# Altium PCB CAN-Shield.PcbDoc
Units mil, origin at the board's own origin, x right, y up, seen from the top; angles counter-clockwise.
Board outline 2755.91 x 2165.35 mil, 2 copper layers (Top Layer, Bottom Layer); 21 components, 23 nets, 156 pads, 6 vias.
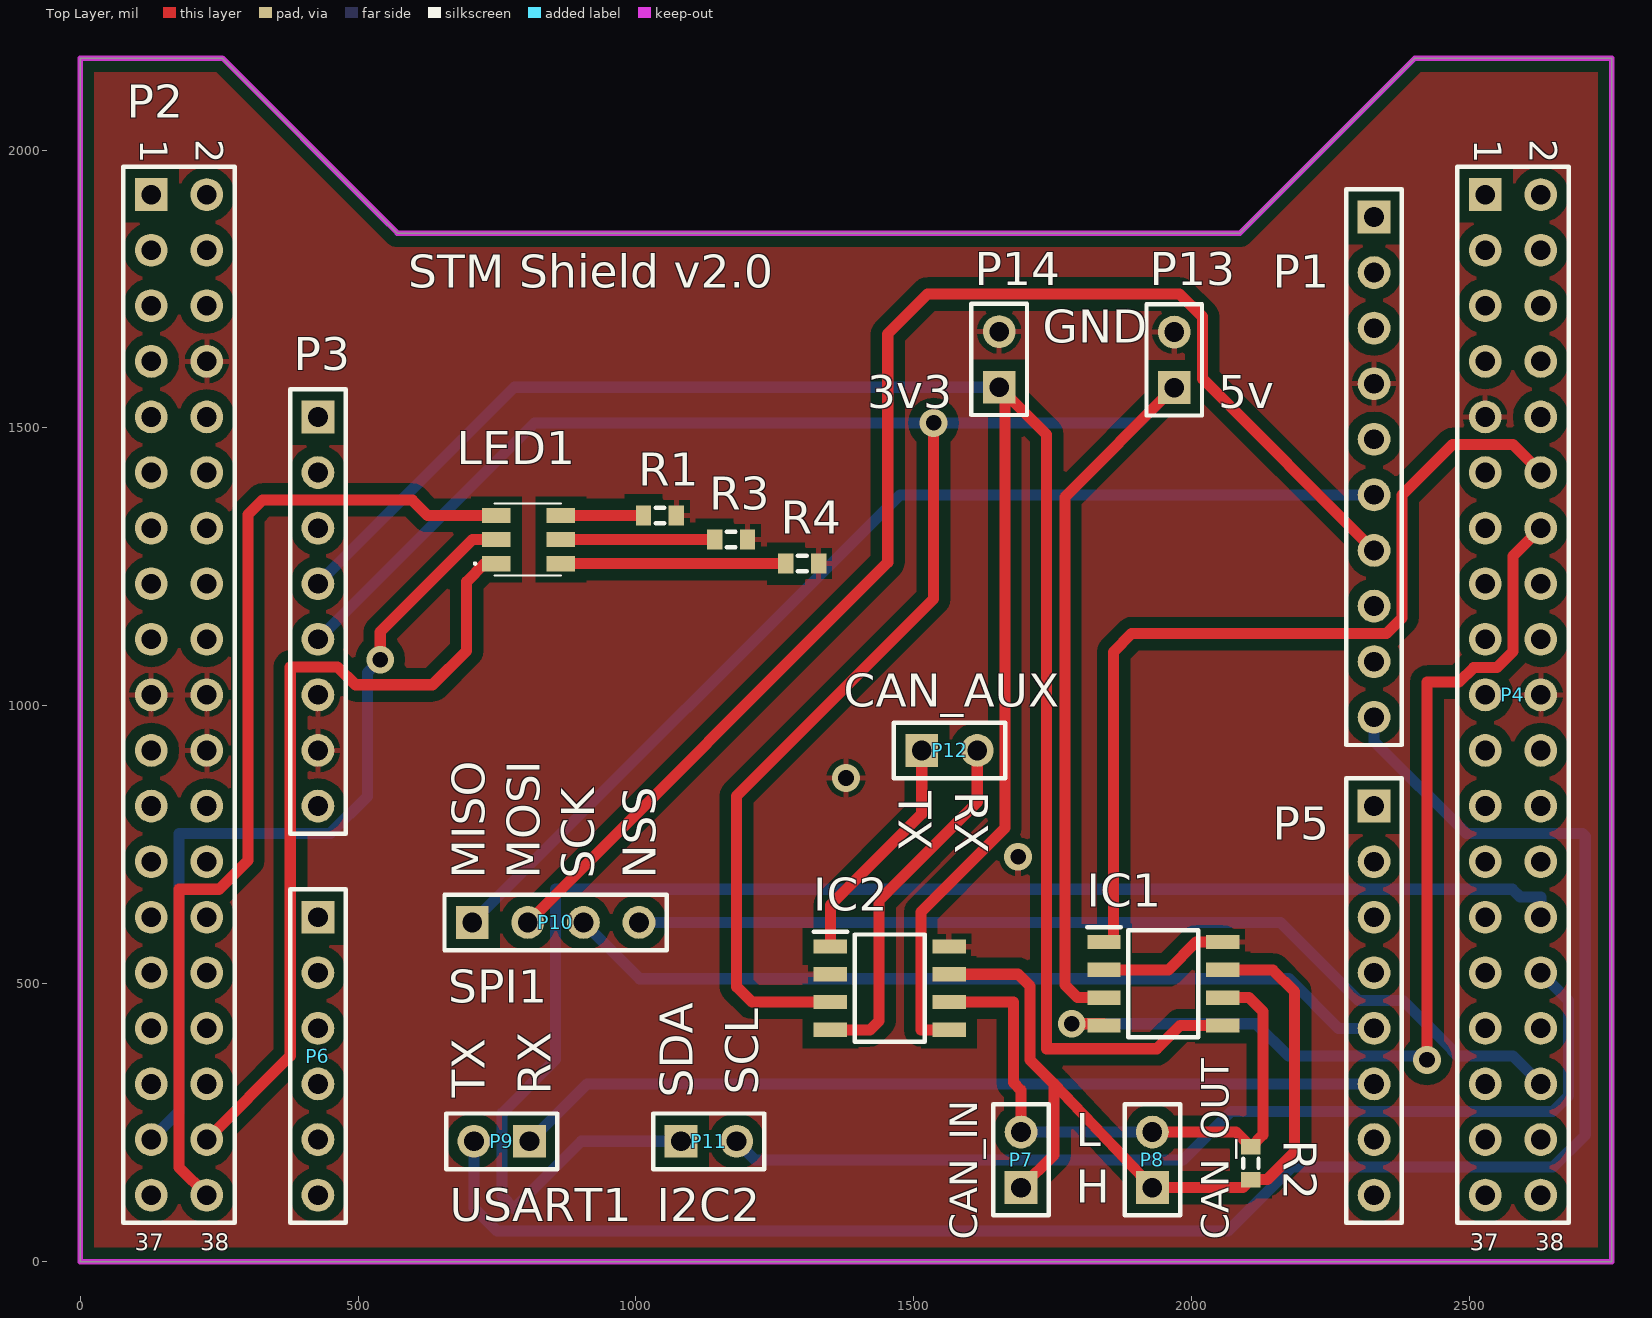
[diagram p0: Top Layer view]
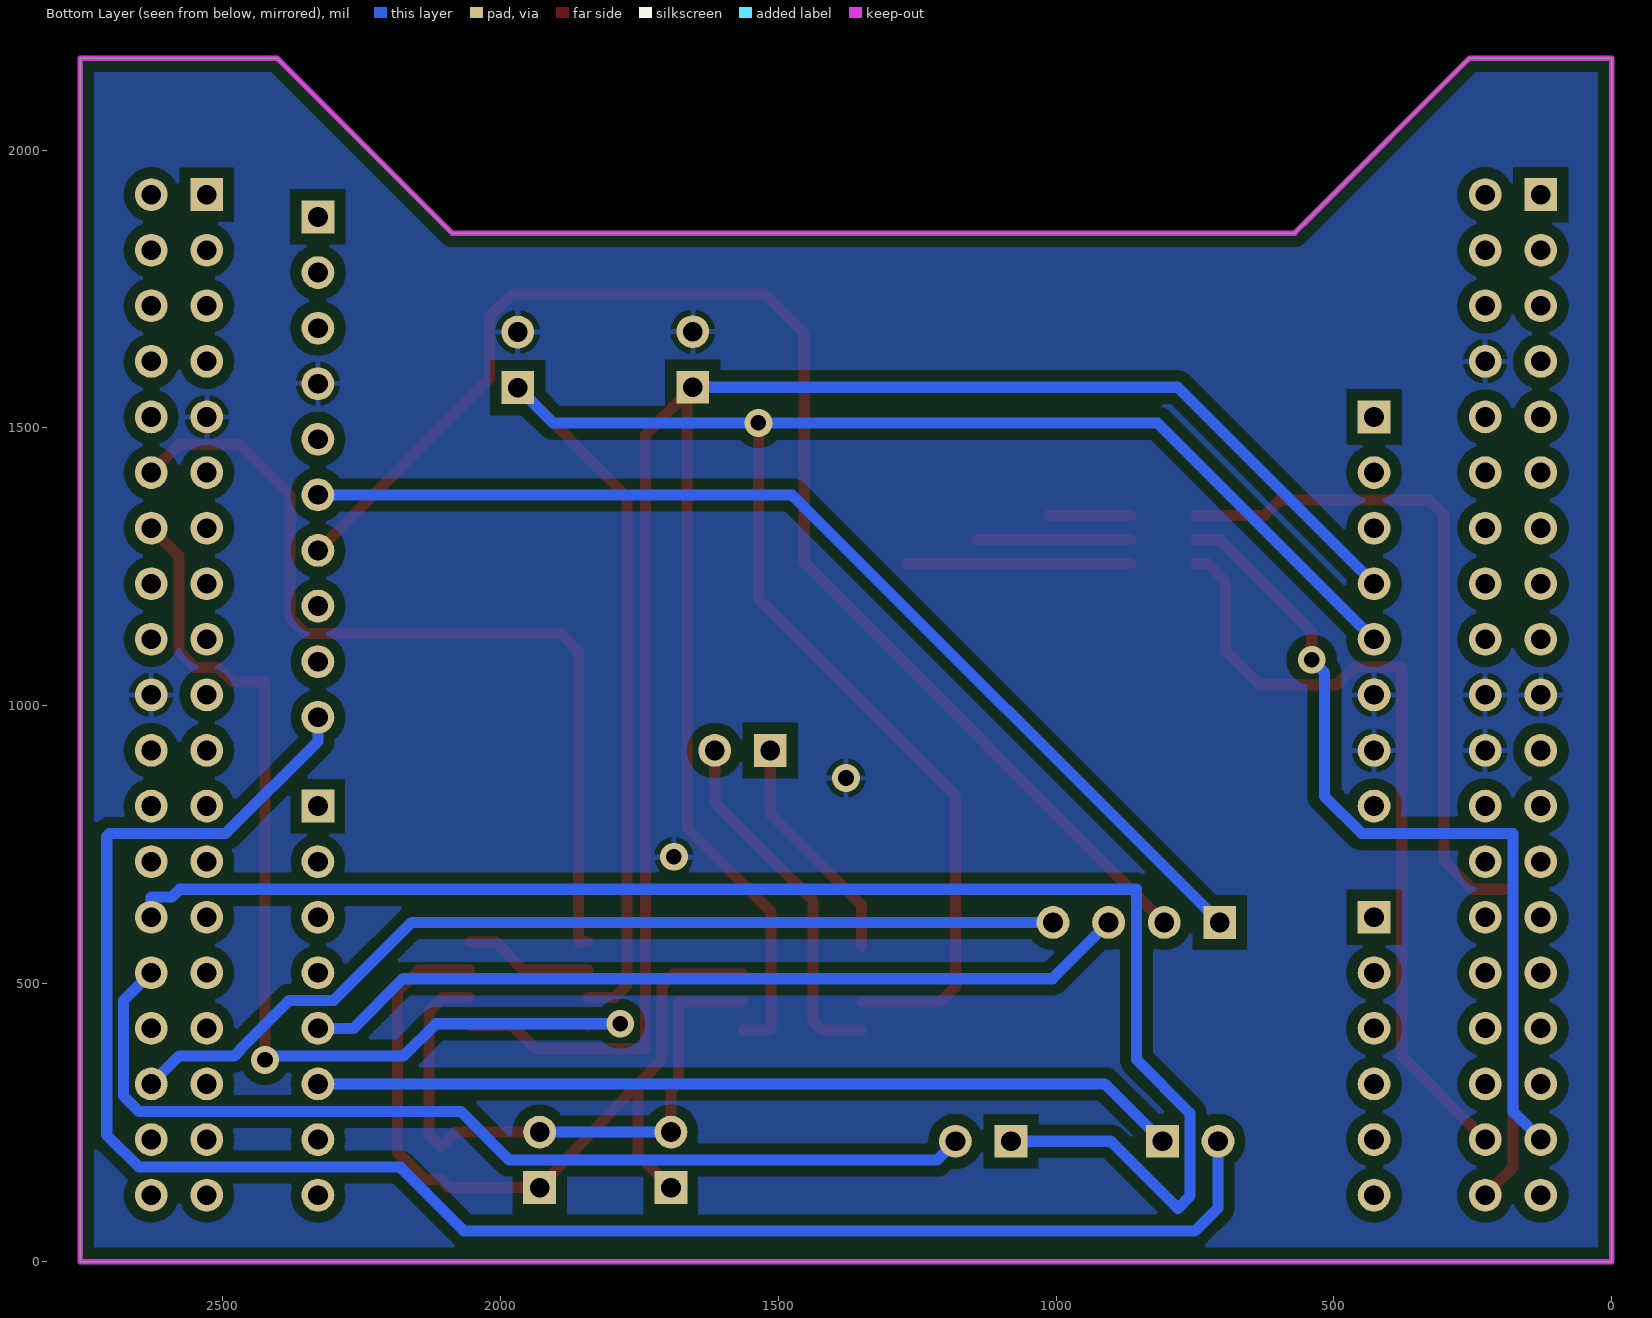
[diagram p1: Bottom Layer view, seen from below]

## Layer stack, top to bottom
Top Solder: solder mask 0.4, Solder Resist, Dk 3.5
Top Layer: signal copper 1.4
Dielectric 1: dielectric 12.6, FR-4, Dk 4.8
Bottom Layer: signal copper 1.4
Bottom Solder: solder mask 0.4, Solder Resist, Dk 3.5

## Board outline
0,0 0,2165.35 255.9,2165.35 541.34,1879.92 570.87,1850.39 2086.61,1850.39 2165.35,1929.13 2401.57,2165.35 2755.91,2165.35 2755.91,0

## Design rules (kind name [scope] priority, off if disabled: settings)
Clearance [All] p1: gap=10 ignorepadtopadclearanceinfootprint=FALSE except(0: Arc-Hole Track-Hole SMDPad-Hole THPad-Hole Via-Hole Fill-Hole Poly-Hole Region-Hole Text-Hole; 20: Arc-Fill Arc-Poly Arc-Region Track-Fill Track-Poly Track-Region SMDPad-Fill SMDPad-Poly SMDPad-Region THPad-Fill THPad-Poly THPad-Region Via-Fill Via-Poly Via-Region Fill-Fill Fill-Poly Fill-Region Poly-Poly Poly-Region Region-Region)
MinimumSolderMaskSliver [All] p1: minsoldermaskwidth=5
PolygonConnect [All] p1: connectstyle=Relief reliefconductorwidth=10 reliefentries=4 polygonreliefangle="90 Angle" airgapwidth=10
RoutingVias [All] p1: holewidth=28 width=50 viastyle="Through Hole" minholewidth=28 minwidth=50 maxholewidth=28 maxwidth=50
SilkToSilkClearance [All] p1: silktosilkclearance=2
SilkToSolderMaskClearance [IsPad] p1: minsilkscreentomaskgap=1 clearancetoexposedcopper=TRUE
SolderMaskExpansion [All] p1: expansion=4
Width [All] p1: maxlimit=20 minlimit=10 preferedwidth=20 minimp=50.000000 maximp=50.000000 favimp=50.000000
27 further rules are at their usual default settings.

## Components (designator, comment, footprint, x,y, rotation, side; value= is the part's Value field where it differs from the comment)
IC1 "TCAN1042HVDQ1" SOIC127P600X175-8N 1948.82,500 r0 top
IC2 "TCAN1042HVDQ1" SOIC127P600X175-8N 1456.69,492.13 r0 top
LED1 "KRTBLSLPS1.32-VUVX-EQ+BTBV-D8+TWTZ-L1-B" KRTBLSLPS132VUVXEQBTBVD8TWTZL1B 807.09,1299.21 r0 top
P1 "Header 10" HDR1X10 2327.95,1879.53 r270 top locked
P2 "Header 19X2" HDR2X19 127.95,1919.68 r270 top locked
P3 "Header 8" HDR1X8 427.95,1519.69 r270 top locked
P4 "Header 19X2" HDR2X19 2527.95,1919.68 r270 top locked
P5 "Header 8" HDR1X8 2327.95,819.68 r270 top locked
P6 "Header 6" HDR1X6 427.95,619.68 r270 top locked
P7 "CAN_IN" HDR1X2 1692.91,133.19 r90 top
P8 "CAN_OUT" HDR1X2 1929.13,133.19 r90 top
P9 "USART1" HDR1X2 808.66,216.54 r180 top
P10 "SPI1" HDR1X4 705.51,610.24 r0 top
P11 "I2C2" HDR1X2 1081.1,216.53 r0 top
P12 "CAN_AUX" HDR1X2 1514.17,919.69 r0 top
P13 "5v" HDR1X2 1968.5,1572.44 r90 top
P14 "3v3" HDR1X2 1653.54,1573.23 r90 top
R1 "Res3" J1-0603 1043.31,1342.52 r0 top value=200
R2 "Res3" J1-0603 2106.3,177.17 r270 top value=120
R3 "Res3" J1-0603 1171.26,1299.21 r0 top value=200
R4 "Res3" J1-0603 1299.21,1255.91 r0 top value=200

## Footprints (in the part's own frame and the unit in brackets; to place one, negate y for a bottom-side part, rotate by r counter-clockwise, add the part's x,y. Pads: shape width x height; smd on the part's side, far side on the other; paste and mask are expansions set on the pad)
HDR1X2 [mm] "Connector; Header; 2 Position"
  rect 1.5x1.5 hole 0.9: 1(0,0)
  round 1.5 hole 0.9: 2(2.54,0)
  silkscreen extent -1.27,-1.27 3.81,1.27
HDR1X4 [mm] "Connector; Header; 4 Position"
  rect 1.5x1.5 hole 0.9: 1(0,0)
  round 1.5 hole 0.9: 2(2.54,0) 3(5.08,0) 4(7.62,0)
  silkscreen extent -1.27,-1.27 8.89,1.27
HDR1X6 [mm] "Connector; Header; 6 Position"
  rect 1.5x1.5 hole 0.9: 1(0,0)
  round 1.5 hole 0.9: 2(2.54,0) 3(5.08,0) 4(7.62,0) 5(10.16,0) 6(12.7,0)
  silkscreen extent -1.27,-1.27 13.97,1.27
HDR1X8 [mm] "Connector; Header; 8 Position"
  rect 1.5x1.5 hole 0.9: 1(0,0)
  round 1.5 hole 0.9: 2(2.54,0) 3(5.08,0) 4(7.62,0) 5(10.16,0) 6(12.7,0) 7(15.24,0) 8(17.78,0)
  silkscreen extent -1.27,-1.27 19.05,1.27
HDR1X10 [mm] "Connector; Header; 10 Position"
  rect 1.5x1.5 hole 0.9: 1(0,0)
  round 1.5 hole 0.9: 2(2.54,0) 3(5.08,0) 4(7.62,0) 5(10.16,0) 6(12.7,0) 7(15.24,0) 8(17.78,0) 9(20.32,0) 10(22.86,0)
  silkscreen extent -1.27,-1.27 24.13,1.27
HDR2X19 [mm] "Connector; Header; 19x2 Position"
  rect 1.5x1.5 hole 0.9: 1(0,0)
  round 1.5 hole 0.9: 2(0,2.54) 3(2.54,0) 4(2.54,2.54) 5(5.08,0) 6(5.08,2.54) 7(7.62,0) 8(7.62,2.54) 9(10.16,0) 10(10.16,2.54) 11(12.7,0) 12(12.7,2.54) 13(15.24,0) 14(15.24,2.54) 15(17.78,0) 16(17.78,2.54) 17(20.32,0) 18(20.32,2.54) 19(22.86,0) 20(22.86,2.54) 21(25.4,0) 22(25.4,2.54) 23(27.94,0) 24(27.94,2.54) 25(30.48,0) 26(30.48,2.54) 27(33.02,0) 28(33.02,2.54) 29(35.56,0) 30(35.56,2.54) 31(38.1,0) 32(38.1,2.54) 33(40.64,0) 34(40.64,2.54) 35(43.18,0) 36(43.18,2.54) 37(45.72,0) 38(45.72,2.54)
  silkscreen extent -1.27,-1.27 46.99,3.81
J1-0603 [mm] "Chip Resistor, Body 1.6x0.8mm, IPC High Density"
  rect 0.7x0.9 smd: 1(-0.75,0) 2(0.75,0)
  silkscreen extent -0.2,-0.35 0.2,0.35, body extent -0.85,-0.48 0.85,0.48, height 0.9
KRTBLSLPS132VUVXEQBTBVD8TWTZL1B [mm]
  rect 1.3x0.7 smd: A1(-1.475,-1.1) A2(-1.475,0) A3(-1.475,1.1) C1(1.475,-1.1) C2(1.475,0) C3(1.475,1.1)
  silkscreen extent -2.5,-1.65 1.48,1.65, body extent -1.55,-1.65 1.55,1.65, height 2.14
SOIC127P600X175-8N [mm]
  rect 1.525x0.65 smd: 1(-2.712,1.905) 2(-2.712,0.635) 3(-2.712,-0.635) 4(-2.712,-1.905) 5(2.712,-1.905) 6(2.712,-0.635) 7(2.712,0.635) 8(2.712,1.905)
  silkscreen extent -3.47,-2.45 1.6,2.58, body extent -3,-2.45 3,2.45, height 1.75

## Part data
IC1 IC2: "Integrated Circuit", Manufacturer_Name="Texas Instruments", Mouser Part Number=595-TCAN1042HVDQ1, Arrow Part Number=TCAN1042HVDQ1, Arrow Price/Stock=https://www.arrow.com/en/products/tcan1042hvdq1/texas-instruments, Datasheet Link=http://www.ti.com/lit/gpn/tcan1042hv-q1, Height=1.75mm, Manufacturer_Part_Number=TCAN1042HVDQ1, Mouser Price/Stock=https://www.mouser.com/Search/Refine.aspx?Keyword=595-TCAN1042HVDQ1
LED1: "LED", Manufacturer_Name=OSRAM, Mouser Part Number=720-KRTBLSLPS13A0062, Arrow Part Number=KRTBLSLPS1.32-VUVX-EQ+BTBV-D8+TWTZ-L1-B, Datasheet Link=https://dammedia.osram.info/media/resource/hires/osram-dam-6176296/KRTB%20LSLPS1.32_EN.pdf, Height=2.04mm, Manufacturer_Part_Number=KRTBLSLPS1.32-VUVX-EQ+BTBV-D8+TWTZ-L1-B, Mouser Price/Stock=https://www.mouser.co.uk/ProductDetail/OSRAM-Opto-Semiconductors/KRTBLSLPS132-VUVX-EQ%2bBTBV-D8%2bTWTZ-L1-B?qs=OlC7AqGiEDms9aB20KQuCA%3D%3D
P1: "Header, 10-Pin", LatestRevisionDate=17-Jul-2002, LatestRevisionNote="Re-released for DXP Platform.", Publisher="Altium Limited"
P2 P4: "Header, 19-Pin, Dual row", LatestRevisionDate=17-Jul-2002, LatestRevisionNote="Re-released for DXP Platform.", Publisher="Altium Limited"
P3 P5: "Header, 8-Pin", LatestRevisionDate=17-Jul-2002, LatestRevisionNote="Re-released for DXP Platform.", Publisher="Altium Limited"
P6: "Header, 6-Pin", LatestRevisionDate=17-Jul-2002, LatestRevisionNote="Re-released for DXP Platform.", Publisher="Altium Limited"
P7 P8 P9 P11 P12 P13 P14: library part "Header 2", "Header, 2-Pin", LatestRevisionDate=17-Jul-2002, LatestRevisionNote="Re-released for DXP Platform.", Publisher="Altium Limited"
P10: library part "Header 4", "Header, 4-Pin", LatestRevisionDate=17-Jul-2002, LatestRevisionNote="Re-released for DXP Platform.", Publisher="Altium Limited"
R1 R2 R3 R4: "Resistor", LatestRevisionDate=29-May-2009, LatestRevisionNote="IPC-7351 Footprint Added.", PackageDescription="Chip Resistor", PackageReference=J1-0603, Published=8-Jun-2000, Publisher="Altium Limited"

## Via types
v1: diameter 50, hole 28, Top Layer to Bottom Layer, 6 vias

## Nets (pads, with @x,y where several pads share a name; then routed paths per layer and width w, separated by ;. In a path a pad name is that pad's centre, name@x,y a point inside that pad or via, vN(x,y) a via of type N, cw(c..) or ccw(c..) an arc to the next point about the centre after c; other vN are vias at no path point)
+5: IC1.3 IC2.3 P3.5 P13.1 | length 4305.3
  Top Layer w20: IC2.3 1208.66,467.13 1181.1,494.69 1181.1,838.1 1535.43,1192.43 v1(1535.43,1509) ; IC1.3 1794.63,475 1771.65,497.98 1771.65,1375.59 P13.1
  Bottom Layer w20: P3.5 817.27,1509 v1(1535.43,1509) 1905.06,1509 P13.1
AUX_CAN_RX: IC2.4 P12.2 | length 653.7
  Top Layer w20: IC2.4 1421.06,417.13 1437.01,433.07 1437.01,649.61 1614.17,826.77 P12.2
AUX_CAN_TX: IC2.1 P12.1 | length 420.6
  Top Layer w20: IC2.1 1349.92,641.26 1514.17,805.51 P12.1
CAN_H: IC1.7 IC2.7 P7.1 P8.1 R2.2 | length 1533.5
  Top Layer w20: IC2.7 1687.6,517.13 1709,495.72 1709,363.03 1751.97,320.07 ; P7.1 1751.97,192.25 1751.97,320.07 ; IC1.7 2145.67,525 2185.04,485.63 2185.04,196.85 2135.83,147.64 R2.2 2091.85,133.19 P8.1 1751.97,320.07
CAN_L: IC1.6 IC2.6 P7.2 P8.2 R2.1 | length 1114.3
  Top Layer w20: IC2.6 1678.54,467.13 1679,466.67 1679,322.21 1692.91,308.29 P7.2 ; P8.2 2079.8,233.19 R2.1 2127.95,228.35 2127.95,450 2102.95,475 IC1.6
  Bottom Layer w20: P7.2 P8.2
CAN_RX: IC1.4 P4.14 | length 1827
  Top Layer w20: v1(1784,428) 1842.05,428 IC1.4 ; v1(2423.26,362.95) 2423.26,1042.74 2480.96,1042.74 2507.44,1069.21 2549.21,1069.21 2578,1098 2578,1269.73 P4.14
  Bottom Layer w20: v1(1784,428) 2116,428 2174,370 2416.21,370 v1(2423.26,362.95)
CAN_TX: IC1.1 P4.12 | length 1612.7
  Top Layer w20: IC1.1 1859,575 1859,1097 1892,1130 2350,1130 2378,1158 2378,1379 2469,1470 2577.64,1470 P4.12
GND: IC1.2 IC1.8 IC2.2 IC2.8 P1.4 P2.8 P2.19 P2.20 P2.22 P3.6 P3.7 P4.9 P4.20 P13.2 P14.2 R1.2 R3.2 R4.2 | length 234.3
  Top Layer w20: IC1.2 1958,525 2008,575 IC1.8
  other v1: 1687.6,728.35 1377.95,870.16
I2C2_SCL: P4.30 P11.2 | length 1800.8
  Bottom Layer w20: P11.2 1214.64,183 1984,183 2071,270 2650,270 2678,298 2678,469.64 P4.30
I2C2_SDA: P4.28 P11.1 | length 2787.7
  Bottom Layer w20: P11.1 901.54,216.54 781,96 759,118 759,267 855.51,363.51 855.51,670 2577,670 2591,656 2627.95,656 P4.28
MISO: P1.6 P10.1 | length 1941.1
  Bottom Layer w20: P10.1 1474.8,1379.53 P1.6
MOSI: P1.7 P10.2 | length 2488.2
  Top Layer w20: P10.2 1453,1257.72 1453,1669 1525,1741 1978,1741 2019,1700 2019,1588.48 P1.7
NetLED1_C1: LED1.C1 R4.1 | length 404.5
  Top Layer w20: LED1.C1 R4.1
NetLED1_C2: LED1.C2 R3.1 | length 276.6
  Top Layer w20: LED1.C2 R3.1
NetLED1_C3: LED1.C3 R1.1 | length 148.6
  Top Layer w20: LED1.C3 R1.1
NSS: P4.34 P10.4 | length 1743.9
  Bottom Layer w20: P10.4 2159.76,610.24 2300,470 2379.85,470 2468.26,381.59 2468.26,379.74 2478,370 2577.64,370 P4.34
RGB_B: LED1.A1 P2.36 | length 1459.9
  Top Layer w20: P2.36 378,369.73 378,1070 463.37,1070 495.45,1037.93 634.29,1037.93 695.18,1098.81 695.18,1223.18 727.91,1255.91 LED1.A1
RGB_G: LED1.A2 P2.35 | length 1521.2
  Top Layer w20: v1(540,1083) 540,1133 706.21,1299.21 LED1.A2
  Bottom Layer w20: P2.35 178,269.73 178,770 450,770 517,837 517,1060 v1(540,1083)
RGB_R: LED1.A3 P2.38 | length 1807.7
  Top Layer w20: P2.38 178,169.64 178,670 250,670 302,722 302,1344 328,1370 597.52,1370 625,1342.52 LED1.A3
SCK: P5.5 P10.3 | length 1501.4
  Bottom Layer w20: P10.3 1006.75,509 2175,509 2264.31,419.69 P5.5
USART1_RX: P5.6 P9.1 | length 1562
  Bottom Layer w20: P9.1 911.81,319.69 P5.6
USART1_TX: P1.10 P9.2 | length 3239.7
  Bottom Layer w20: P9.2 708.66,96.34 750,55 2065,55 2180,170 2650,170 2708,228 2708,765 2703,770 2494,770 2327.95,936.05 P1.10
VCC: IC1.5 IC2.5 P3.4 P14.1 | length 4211.2
  Top Layer w20: IC2.5 1513,417.13 1513,629 1664,780 P14.1@1664,1562.77 ; IC1.5 1979,425 1937,383 1739,383 1739,1487.77 P14.1@1664,1562.77 ; P14.1@1664,1562.77 P14.1 1664,1573.23 P14.1@1664,1562.77
  Bottom Layer w20: P3.4 781.49,1573.23 P14.1
pads on no net: P1.1 P1.2 P1.3 P1.5 P1.8 P1.9 P2.1 P2.2 P2.3 P2.4 P2.5 P2.6 P2.7 P2.9 P2.10 P2.11 P2.12 P2.13 P2.14 P2.15 P2.16 P2.17 P2.18 P2.21 P2.23 P2.24 P2.25 P2.26 P2.27 P2.28 P2.29 P2.30 P2.31 P2.32 P2.33 P2.34 P2.37 P3.1 P3.2 P3.3 P3.8 P4.1 P4.2 P4.3 P4.4 P4.5 P4.6 P4.7 P4.8 P4.10 P4.11 P4.13 P4.15 P4.16 P4.17 P4.18 P4.19 P4.21 P4.22 P4.23 P4.24 P4.25 P4.26 P4.27 P4.29 P4.31 P4.32 P4.33 P4.35 P4.36 P4.37 P4.38 P5.1 P5.2 P5.3 P5.4 P5.7 P5.8 P6.1 P6.2 P6.3 P6.4 P6.5 P6.6

## Polygon pours and split planes (outlines as drawn)
GND on Top Layer "GND_L01_P004" (solid, pour order 4): 0,2165.35 255.9,2165.35 570.86,1850.39 2086.61,1850.39 2401.57,2165.35 2755.91,2165.35 2755.91,0 0,0
GND on Bottom Layer "GND_L02_P008" (solid, pour order 8): 0,2165.35 255.91,2165.35 570.87,1850.39 2086.61,1850.39 2401.57,2165.35 2755.91,2165.35 2755.91,0 0,0

## Keep-outs
Keep-Out Layer:
  the board outline again, w10

## Silkscreen, mask and mechanical layers (free items; w line width, h text height)
Top Overlay:
  text "STM Shield v2.0" at 590.55,1751.97 h60
  text "GND" at 1732.28,1653.54 h60
  text "TX" at 1472.44,846.46 h60 r270
  text "RX" at 1574.8,846.46 h60 r270
  text "MISO" at 728.35,688.98 h60 r90
  text "MOSI" at 826.77,688.98 h60 r90
  text "SCK" at 925.2,688.98 h60 r90
  text "NSS" at 1035.43,688.98 h60 r90
  text "RX" at 846.46,300.26 h60 r90
  text "SCL" at 1220.47,300.26 h60 r90
  text "TX" at 728.35,295.28 h60 r90
  text "SDA" at 1102.36,295.28 h60 r90
  text "L" at 1791.34,207.88 h60
  text "H" at 1791.34,106.3 h60

## Text inside footprints (layer, text, board x,y; h text height)
P2: Top Overlay "2" at 207.95,2019.68 h50 r270; Top Overlay "1" at 107.95,2019.68 h50 r270; Top Overlay "37" at 98.43,19.68 h30; Top Overlay "38" at 216.54,19.68 h30
P4: Top Overlay "2" at 2607.95,2019.68 h50 r270; Top Overlay "1" at 2507.95,2019.68 h50 r270; Top Overlay "37" at 2500,19.68 h30; Top Overlay "38" at 2618.11,19.68 h30